# Altium PCB MLC - 8266.PcbDoc
Units mil, origin at the board's own origin, x right, y up, seen from the top; angles counter-clockwise.
Board outline 1791.34 x 663.39 mil, 2 copper layers (Top, Bottom), stack 10.63 mil thick; 37 components, 35 nets, 142 pads, 83 vias.
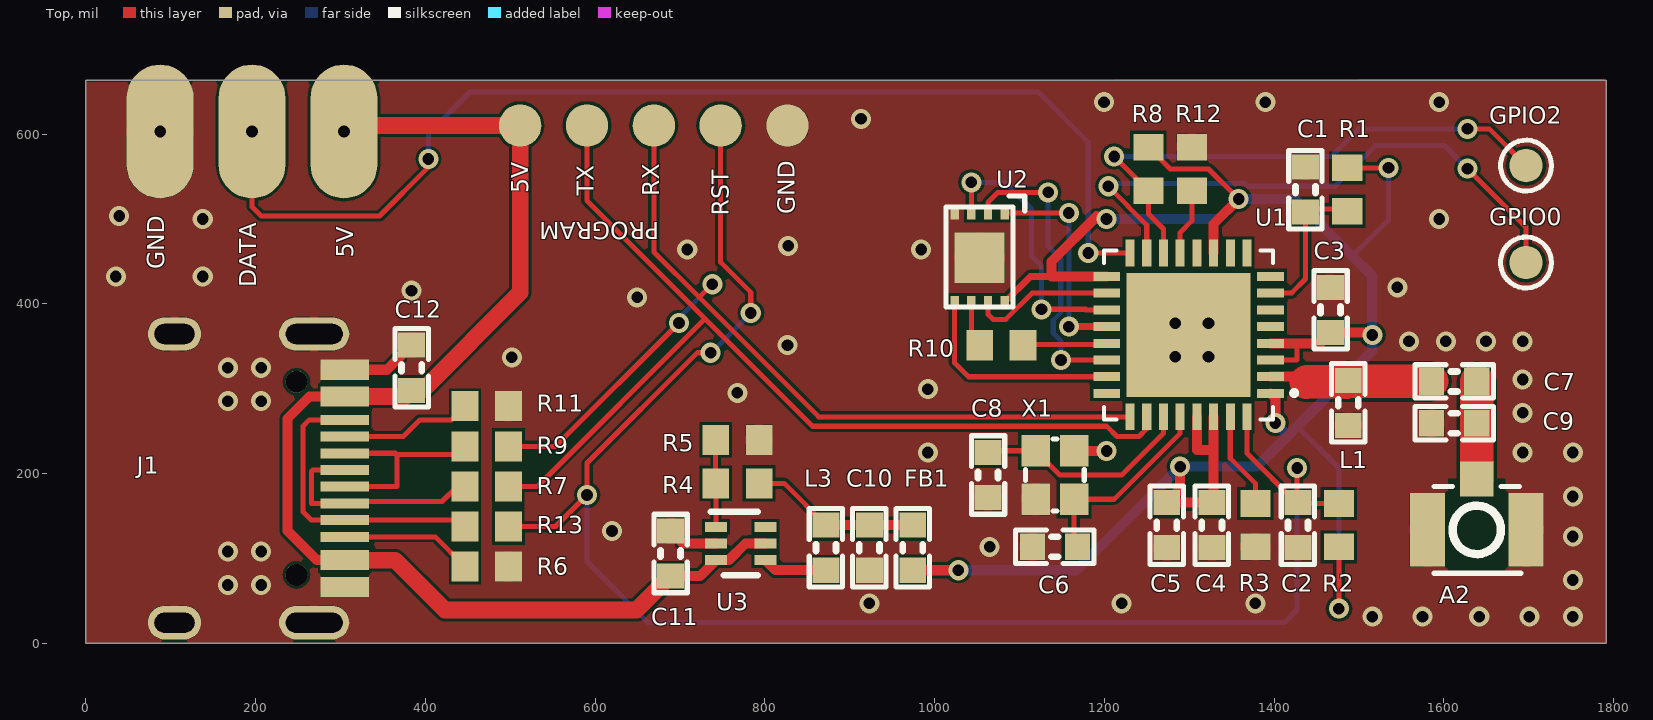
[diagram p0: Top view]
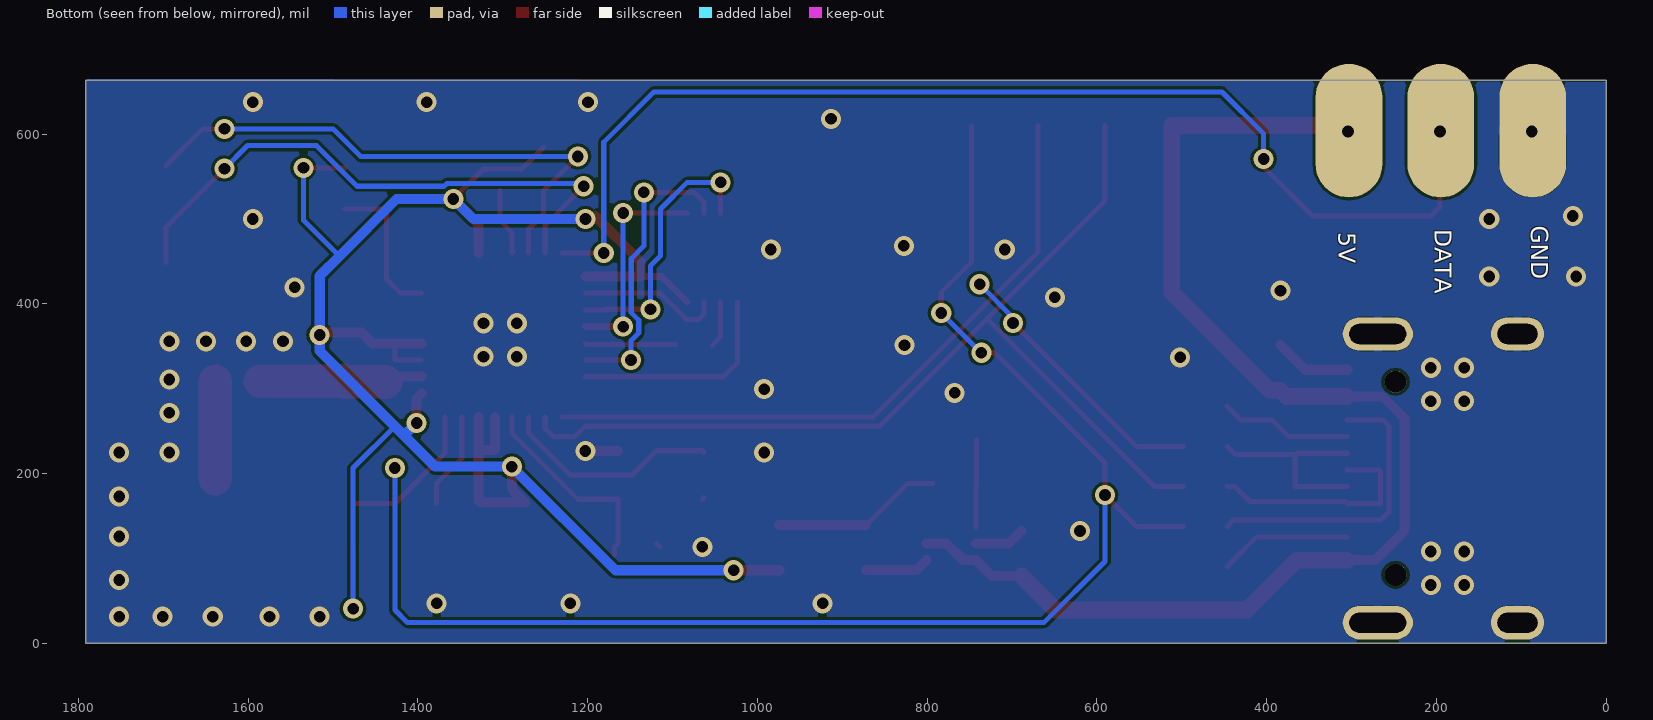
[diagram p1: Bottom view, seen from below]
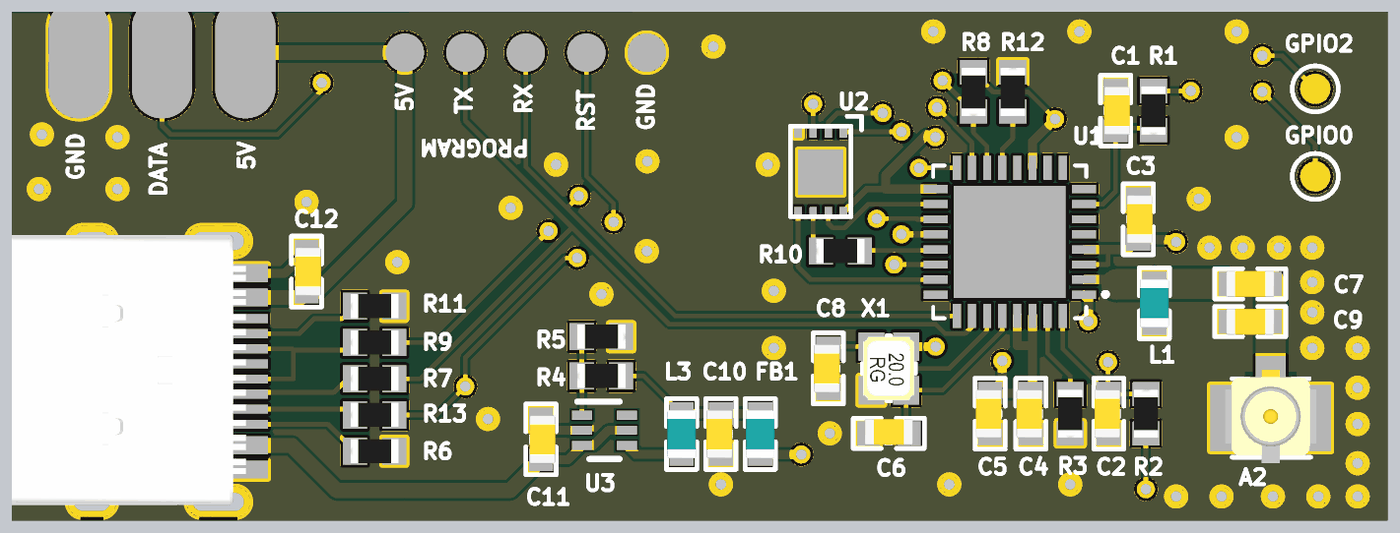
[diagram p2: 3D render of the assembled board from above, using the file's embedded part models]

## Layer stack, top to bottom
Top Solder: solder mask 0.4, Solder Resist, Dk 3.5
Top: signal copper 1.378
Prepreg: core 7.874, 7628, Dk 4.2
Bottom: signal copper 1.378
Bottom Solder: solder mask 0.4, Solder Resist, Dk 3.5

## Board outline
0,0 0,663.39 1791.34,663.39 1791.34,0

## Design rules (kind name [scope] priority, off if disabled: settings)
Clearance [All] p1: gap=3.5 ignorepadtopadclearanceinfootprint=TRUE
ComponentClearance [All] p1 off: gap=10 collisioncheckmode=3 verticalgap=10 showdistances=FALSE
DiffPairsRouting [All] p1: maxlimit=10 minlimit=3.5 mostfreqgap=7.87 toplayer_minwidth=3.5 toplayer_maxwidth=15 toplayer_prefwidth=5.91 bottomlayer_minwidth=3.5 bottomlayer_maxwidth=15 bottomlayer_prefwidth=5.91 maxuncoupledlength=500
MatchedLengths usb [All] p1: tolerance=39.37 checknetsindiffpair=FALSE checkdiffpairvsdiffpair=TRUE checkxsignals=TRUE checkothers=TRUE
PolygonConnect 2pinconn [InNet('GND')] p1 off: connectstyle=Direct reliefconductorwidth=10 reliefentries=4 polygonreliefangle="90 Angle" airgapwidth=10
PolygonConnect vbus [InNet('VBUS')] p2 off: connectstyle=Direct reliefconductorwidth=10 reliefentries=4 polygonreliefangle="90 Angle" airgapwidth=10
PolygonConnect nothermals [InNet('VOUT')] p3 off: connectstyle=Direct reliefconductorwidth=0 reliefentries=4 polygonreliefangle="90 Angle" airgapwidth=0
PolygonConnect PolygonConnect_1 [All] p4 off: connectstyle=Relief reliefconductorwidth=10 reliefentries=4 polygonreliefangle="90 Angle" airgapwidth=10
RoutingVias [All] p1: holewidth=13.78 width=23.62 viastyle="Through Hole" minholewidth=7.87 minwidth=17.72 maxholewidth=248.03 maxwidth=50
SolderMaskExpansion [All] p1: expansion=4
Width [All] p1: maxlimit=39.37 minlimit=5 preferedwidth=7.87
28 further rules are at their usual default settings.

## Components (designator, comment, footprint, x,y, rotation, side; value= is the part's Value field where it differs from the comment)
A2 "U.FL-R-SMT-1" "COAXIAL RF U.FL-R-SMT-1" 1638.78,133.86 r180 top
C1 "100nF" C0603 1437.01,534.72 r270 top value=100pF
C2 "100nF" C0603 1428.13,139.41 r90 top value=100pF
C3 "1uF" C0603 1466.54,392.99 r270 top value=100pF
C4 "100nF" C0603 1326.77,139.41 r90 top value=100pF
C5 "1uF" C0603 1273.62,139.41 r90 top value=100pF
C6 "10pF" C0603 1141.73,113.82 r0 top value=100pF
C7 "8.2pF" CAPC1608X06L 1612.2,308.7 r0 top value=100pF
C8 "10pF" C0603 1062.99,198.46 r90 top value=100pF
C9 "2.4pF" CAPC1608X06L 1612.2,259.49 r0 top value=100pF
C10 "22uF" C0603 923.23,112.83 r90 top value=100pF
C11 "4.7uF" C0603 688.98,105.94 r270 top value=100pF
C12 "1uF" C0603 383.86,324.8 r270 top value=100pF
FB1 "Ferrite" IND0603 974.41,112.83 r90 top value=120R/0.55A
GPIO0 "TP" TP_SMD_Ø1.0mm 1696.85,448.82 r90 top
GPIO2 "TP" TP_SMD_Ø1.0mm 1696.85,562.99 r90 top
J1 "USB-C" TYPE-C-31-M-12 305.12,322.48 r270 top locked
L1 "1.5nH" IND0603 1487.42,283.46 r90 top value=120R/0.55A
L3 "1uH" IND0603 872.05,112.83 r90 top value=120R/0.55A
PROGRAM "Programmer" ProgramPins 669.29,610.24 r180 top
R1 "10K" RES0603R 1486.22,534.72 r90 top value=0R
R2 "10K" RES0603R 1476.38,139.41 r270 top value=0R
R3 "12K" RES0603R 1377.95,139.41 r90 top value=0R
R4 "453K" RES0603R 767.72,188.62 r0 top value=0R
R5 "100K" RES0603R 767.72,239.8 r180 top value=0R
R6 "1K" RES0603R 472.44,90.55 r0 top value=0R
R7 "0R" RES0603R 472.44,185.04 r0 top
R8 "10K" RES0603R 1251.97,559.06 r90 top value=0R
R9 "0R" RES0603R 472.44,232.28 r0 top
R10 "50R" RES0603R 1078.74,351.38 r0 top value=0R
R11 "1K" RES0603R 472.44,279.53 r0 top value=0R
R12 "10K" RES0603R 1303.15,559.06 r270 top value=0R
R13 "0R" RES0603R 472.44,137.8 r0 top
U1 "ESP8266EX" *QFN50P500X500X80-33N 1299.21,363.46 r180 top locked
U2 "FM25Q08A-DN-T-G" FM25Q08A 1023.62,506.54 r0 top
U3 "TLV62568ADRLR" DRL0006A 771.65,117.76 r0 top value=N/A
X1 "26MHZ" BT-XTAL_2016 1141.73,198.46 r270 top value=32MHz

## Footprints (in the part's own frame and the unit in brackets; to place one, negate y for a bottom-side part, rotate by r counter-clockwise, add the part's x,y. Pads: shape width x height; smd on the part's side, far side on the other; paste and mask are expansions set on the pad)
*QFN50P500X500X80-33N [mm]
  rect 0.8x0.27 smd: 1(-2.45,1.75) 2(-2.45,1.25) 3(-2.45,0.75) 4(-2.45,0.25) 5(-2.45,-0.25) 6(-2.45,-0.75) 7(-2.45,-1.25) 8(-2.45,-1.75) 17(2.45,-1.75) 18(2.45,-1.25) 19(2.45,-0.75) 20(2.45,-0.25) 21(2.45,0.25) 22(2.45,0.75) 23(2.45,1.25) 24(2.45,1.75)
  rect 0.27x0.8 smd: 9(-1.75,-2.45) 10(-1.25,-2.45) 11(-0.75,-2.45) 12(-0.25,-2.45) 13(0.25,-2.45) 14(0.75,-2.45) 15(1.25,-2.45) 16(1.75,-2.45) 25(1.75,2.45) 26(1.25,2.45) 27(0.75,2.45) 28(0.25,2.45) 29(-0.25,2.45) 30(-0.75,2.45) 31(-1.25,2.45) 32(-1.75,2.45)
  rect 3.7x3.7 smd: 33(0,0)
  silkscreen extent -3.24,-2.53 2.53,2.53, body extent -2.53,-2.53 2.53,2.53, height 0.85
BT-XTAL_2016 [mm]
  rect 0.95x0.85 smd: 1(-0.725,-0.575) 2(0.725,-0.575) 3(0.725,0.575) 4(-0.725,0.575)
  silkscreen extent -1.08,-0.88 1.08,0.88, body extent -1.05,-0.85 1.05,0.85, height 0.56
C0603 [mm]
  rect 0.75x0.8 smd: 1(-0.675,0) 2(0.675,0)
  silkscreen extent -1.17,-0.5 1.17,0.5, body extent -0.8,-0.38 0.8,0.48, height 0.8
CAPC1608X06L [mm]
  rect 0.75x0.8 smd: 1(-0.675,0) 2(0.675,0)
  silkscreen extent -1.17,-0.5 1.17,0.5, body extent -0.8,-0.43 0.8,0.43, height 0.8
"COAXIAL RF U.FL-R-SMT-1" [mm]
  rect 1x1.05 smd: 1(0,-1.525)
  rect 1.05x2.2 smd: 2(-1.475,0) 2(1.475,0)
  Top pour cut-out: 0.85,1.3 -0.85,1.3 -0.85,-1.525 0.85,-1.525
  silkscreen extent -1.32,-1.3 1.28,1.3, body extent -1.5,-1.6 1.5,1.5, height 1.25
DRL0006A [mm]
  rect 0.67x0.3 smd paste+0 mask+0.051: 1(-0.74,0.5) 2(-0.74,0) 3(-0.74,-0.5) 4(0.74,-0.5) 5(0.74,0) 6(0.74,0.5)
  silkscreen extent -0.9,-0.95 0.5,0.95, body extent -0.76,-0.76 0.76,0.89, height 0.25
FM25Q08A [mm] "Flashboi"
  rect 0.25x0.35 smd: 1(1.5,0) 2(1,0) 3(0.5,0) 4(0,0) 5(0,-2.65) 6(0.5,-2.65) 7(1,-2.65) 8(1.5,-2.65)
  rect 1.5x1.5 smd: 4(0.75,-1.325)
  silkscreen extent -0.25,-2.8 2.1,0.53, body extent -0.13,-2.79 1.65,0.13, height 0.75
IND0603 [mm]
  rect 0.75x0.8 smd: 1(-0.675,0) 2(0.675,0)
  silkscreen extent -1.17,-0.5 1.17,0.5, body extent -0.8,-0.48 0.8,0.48, height 0.8
ProgramPins [mm]
  round 1.27 smd: 1(4,0) 2(2,0) 3(0,0) 4(-2,0) 5(-4,0)
RES0603R [mm] "resistor 0603 reflow soldering"
  rect 0.8x0.9 smd: 1(-0.65,0) 2(0.65,0)
  body extent -0.8,-0.4 0.8,0.4, height 0.45
TP_SMD_Ø1.0mm [mm]
  round 1 smd paste-5: 1(0,0)
  silkscreen extent -0.76,-0.76 0.76,0.76
TYPE-C-31-M-12 [mm]
  rect 0.6x1.45 smd: 1(0,0) 1(6.5,0) 2(0.8,0) 2(5.7,0)
  rect 0.3x1.45 smd: 3(1.5,0) 4(2,0) 5(2.5,0) 6(3,0) 7(3.5,0) 8(4,0) 9(4.5,0) 10(5,0)
  oval 1x2.1 hole 1.7 slot 0.6 at 0 deg: 11(-1.07,-0.915) 11(7.57,-0.915)
  oval 1x1.6 hole 1.2 slot 0.6 at 0 deg: 11(-1.07,-5.095) 11(7.57,-5.095)
  round 0.65 hole 0.65: 12(0.36,-1.445) 12(6.14,-1.445)
  body extent -1.27,-7.75 7.68,0, height 3.27

## Part data
A2: "ONN U.FL RCPT STR 50 OHM SMD", Manufacturer="Hirose Electric Co Ltd", Part number IPS=N.A., Supplier Part Number 1=H11891DKR-ND, Artikkelnr Noca=N.A., ComponentLink1Description=Datasheet, ComponentLink1URL=https://media.digikey.com/pdf/Data%20Sheets/Hirose%20PDFs/UFL%20Series.pdf, ComponentLink2Description="Supplier link", Footprint Doc="COAXIAL RF U.FL-R-SMT-1", LatestRevisionDate=2018-05-07, Manufacturer Part Number=U.FL-R-SMT-1, Part Number=U.FL-R-SMT-1, Pin Count=3, Published=2018-05-07, Publisher="Nordic Semiconductor", Supplier 1=Digi-Key
C1 C2 C3 C4 C5 C6 C7 C8 C9 C10 C11 C12: library part CAP, "Capacitor", Published=8-Jun-2000, Publisher="Altium Limited", Revision="July-2002: Re-released for DXP Platform."
FB1: "Ferrite Bead, 120 Ohm @ 100MHz, 500mA, 250 mOhm Max", Manufacturer=Murata, Manufacturer Part Number=BLM15AG121SN1D, Part Number=FB0402-120R@100M-500mA, Part number IPS=N.A., Supplier Part Number 1=490-1005-1-ND, Artikkelnr Noca=33029317, ComponentLink1Description=Datasheet, ComponentLink2Description="Supplier link", Footprint Doc=0402, HelpURL=http://search.murata.co.jp/Ceramy/image/img/PDF/ENG/L0110S0100BLM15A_SN.pdf, LatestRevisionDate=2014-01-10, Note="Chip EMIFIL Inductor Type Chip Ferrite Bead", Pin Count=2, Published=2011-11-14, Publisher="Nordic Semiconductor", Supplier 1=Digi-Key, Supplier 2=Farnell, Supplier Part Number 2=151-5760
L1 L3: "Inductor", Manufacturer=Murata, Manufacturer Part Number=BLM15AG121SN1D, Part Number=FB0402-120R@100M-500mA, Part number IPS=N.A., Supplier Part Number 1=490-1005-1-ND, Artikkelnr Noca=33029317, ComponentLink1Description=Datasheet, ComponentLink2Description="Supplier link", Footprint Doc=0402, HelpURL=http://search.murata.co.jp/Ceramy/image/img/PDF/ENG/L0110S0100BLM15A_SN.pdf, LatestRevisionDate=2014-01-10, Note="Chip EMIFIL Inductor Type Chip Ferrite Bead", Pin Count=2, Published=2011-11-14, Publisher="Nordic Semiconductor", Supplier 1=Digi-Key, Supplier 2=Farnell, Supplier Part Number 2=151-5760
PROGRAM: "Programmer header"
R1 R2 R3 R4 R5 R6 R7 R8 R9 R10 R11 R12 R13: "Resistor, ±5%, 0.05W", Part Number=R0201-0R, Part number IPS=00000003245, Artikkelnr Noca=N.A., ComponentLink1Description=Datasheet, ComponentLink2Description="Supplier link", Footprint Doc=0201, LatestRevisionDate=2017-11-09, Note="Chip Res 5%", Pin Count=2, Published=2014-11-13, Publisher="Nordic Semiconductor"
U1: Package="VFQFN-32 Espressif Systems", Availability=Unavailable, MF="Espressif Systems", MP=ESP8266EX, Price=None, SnapEDA_Link=https://www.snapeda.com/parts/ESP8266EX/Espressif%20Systems/view-part/555861/?ref=snap
U2: library part Flash, "FM25Q08A-DN-T-G, 8Mb flash, compadable with  FM25W02-SN-T-G, 2Mb flash"
U3: Manufacturer Name="Texas Instruments", Manufacturer Part Number=TLV62568ADRLR, PackageReference=TLV62568ADRLR
X1: "X201626MOD4SI", Manufacturer=Golledge, Manufacturer Part Number=MP06003, Part Number=XTAL_SMD2016_32MHz_8pF_Golledge, Part number IPS=N.A., Artikkelnr Noca=22010050, ComponentLink1Description=Datasheet, ComponentLink2Description="Supplier link", Footprint Doc=XTAL_2016, HelpURL=\\hizz\pro\app9717\Datasheet\crystals\Golledge\mp06003.pdf, LatestRevisionDate=2016-11-02, Note="XTAL SMD 32.000MHz", Pin Count=4, Published=2016-11-02, Publisher="Nordic Semiconductor", Supplier 1="Link Nordic"

## Free pads (board coordinates)
  oval 78.74x157.48 smd far side: 5(86.61,604.21) 5(194.88,604.21) 5(303.15,604.21)
  oval 78.74x157.48 smd: 5(87.6,603.23) 5(195.87,603.23) 5(304.13,603.23)

## Via types
v1: diameter 23.62, hole 13.78, Top to Bottom, 83 vias

## Nets (pads, with @x,y where several pads share a name; then routed paths per layer and width w, separated by ;. In a path a pad name is that pad's centre, name@x,y a point inside that pad or via, vN(x,y) a via of type N, cw(c..) or ccw(c..) an arc to the next point about the centre after c; other vN are vias at no path point)
3.3V: C10.2 FB1.2 L3.2 R4.2 | length 201.5
  Top w6: R4.2 822.83,188.62 L3.2
  Top w12: L3.2 C10.2 FB1.2
3V3: C3.2 C4.2 C5.2 FB1.1 R1.2 R2.2 R8.2 U1.1 U1.3 U1.4 U1.11 U1.17 U1.29 U1.30 U2.8 | length 2521.2
  Top w6: R8.2 1277.56,559.06 1322.83,559.06 v1(1358.27,523.62) ; U1.3 1427.17,333.94 1427.17,351.65 1429.13,353.62 ; v1(1476.38,40.98) R2.2 ; R1.2 v1(1534.72,560.31)
  Top w8: U2.8 1112.83,432.36 1137.8,432.36
  Top w11.81: v1(1289.37,208.31) 1289.37,181.73 C5.2 C4.2 1328.74,167.95 1328.74,227.99 ; U1.29 1309.06,227.99 1328.74,227.99 ; U1.30 1328.74,227.99 ; U1.11 1328.74,494.09 v1(1358.27,523.62) ; U1.1 1401.57,288.66 v1(1401.57,259.84) ; U1.4 1429.13,353.62 1453.74,353.62 C3.2 1512.8,366.42 v1(1515.75,363.46)
  Top w12: FB1.1 v1(1027.95,86.26) ; v1(1202.55,500) 1194.17,500 1190.94,503.23 1137.8,450.08 1137.8,432.36 U1.17
  Bottom w6: 1427.17,255.91 1476.38,206.69 v1(1476.38,40.98) ; 1492.48,456.34 1534.72,498.58 v1(1534.72,560.31)
  Bottom w12: v1(1027.95,86.26) 1167.32,86.26 v1(1289.37,208.31) 1379.57,208.31 1417.32,246.06 ; v1(1202.55,500) 1334.65,500 v1(1358.27,523.62) 1425.2,523.62 1492.48,456.34 1515.75,433.07 v1(1515.75,363.46) 1515.75,344.49 1427.17,255.91 1417.32,246.06 ; v1(1401.57,259.84) 1415.35,246.06 1417.32,246.06
5V: C11.2 C12.2 J1.2 pad.5@303.15,604.21 pad.5@304.13,603.23 PROGRAM.1 U3.3 U3.5 | length 1509.6
  Top w11.81: J1.2@305.12,98.07 272.27,98.07 237.63,132.71 237.63,264.99 263.62,290.98 J1.2@305.12,290.98 ; C11.2 723.82,79.37 U3.3 757.52,98.07 777.2,117.76 U3.5
  Top w19.68: v1(304.13,603.23) 311.14,610.24 PROGRAM.1 511.81,413.39 396.65,298.23 C12.2 376.61,290.98 J1.2@305.12,290.98 ; J1.2@305.12,98.07 364.53,98.07 423.23,39.37 648.98,39.37 C11.2
EN: C1.2 R1.1 U1.7 | length 185.4
  Top w6: U1.7 1420.87,412.68 1420.87,413.27 1437.01,429.41 C1.2 1433.35,511.81 R1.1@1486.22,511.81
GND: A2.2 C1.1 C2.1 C3.1 C4.1 C5.1 C6.1 C8.1 C9.1 C10.1 C11.1 C12.1 J1.1 J1.11 L1.1 pad.5@86.61,604.21 pad.5@87.6,603.23 PROGRAM.5 R3.1 R5.1 R6.2 R11.2 R12.1 U1.33 U2.4 U3.2 X1.2 X1.4 | length 197.2
  Top w6: C8.1 C8.1@1064.96,169.92 ; C6.1 C6.1@1119.09,117.76
  Top w11.81: J1.1@305.12,322.48 354.96,322.48 C12.1 ; C11.1 703.74,117.76 U3.2 ; X1.4 1202.55,227.01 v1(1202.76,226.8)
  other v1: 1515.75,31.5 1574.8,31.5 1641.73,31.5 1700.79,31.5 1751.97,31.5 923.23,47.24 1220.47,47.24 1377.95,47.24 167.32,68.9 206.69,68.9 1751.97,74.8 167.32,108.27 206.69,108.27 1064.96,113.82 1751.97,125.98 620.08,132.52 1751.97,173.23 992.13,225.04 1692.91,225.04 1751.97,225.04 1692.91,271.65 167.32,285.43 206.69,285.43 767.72,295.28 992.13,299.65 1692.91,311.02 167.32,324.8 206.69,324.8 501.97,337.07 1283.46,337.87 1322.83,337.87 826.77,351.38 1559.06,355.94 1602.36,355.94 1649.61,355.94 1692.91,355.94 1283.46,377.24 1322.83,377.24 649.61,407.8 383.86,415.63 1545.28,419.57 35.43,432.36 137.8,432.36 708.66,464.21 984.25,464.21 827.52,468.5 137.8,500 1594.49,500 39.37,503.58 87.6,603.23 913.39,618.11 1199.61,637.8 1389.76,637.8 1594.49,637.8
GPIO12: U1.10
GPIO13: U1.12
GPIO14: U1.9
GPIO15: R12.2 U1.13 | length 82
  Top w6: U1.13@1287.4,461.89 U1.13 1289.37,484.21 1303.15,497.99 R12.2
GPIO16: U1.8
LED: pad.5@194.88,604.21 pad.5@195.87,603.23 U1.16 | length 1366.4
  Top w6: v1(195.87,603.23) 195.87,514.41 206.69,503.58 346.1,503.58 403.54,561.02 v1(403.54,570.87) ; v1(1181.1,459.92) U1.16
  Bottom w6: v1(403.54,570.87) 403.54,600.39 452.76,649.61 1122.05,649.61 1181.1,590.55 v1(1181.1,459.92)
NetA2_1: A2.1 C7.2 C9.2 | length 114.8
  Top w39.37: A2.1 C9.2 C7.2
NetC6_2: C6.2 U1.28 X1.3 | length 244.1
  Top w6: C6.2@1168.31,103.98 C6.2 1164.37,117.76 X1.3 1211.61,169.92 1289.37,247.68 U1.28
NetC7_1: C7.1 L1.2 U1.2 | length 243.1
  Top w8: 1425.2,314.25 1483.2,314.25 L1.2
  Top w11.81: U1.2 1425.2,314.25
  Top w39.37: 1438.01,307.75 1438.57,308.31 1484.57,308.31 1485.13,307.75 L1.2 1488.76,308.7 C7.1
NetC8_2: C8.2 U1.27 X1.1 | length 259
  Top w6: C8.2 1064.96,227.01 X1.1 1147.64,198.46 1220.47,198.46 1269.68,247.68 U1.27
NetGPIO0_1: GPIO0.1 U1.15 | length 693.6
  Top w6: v1(1204.72,538.66) 1227.75,515.63 1227.75,515.02 1250,492.78 U1.15 ; v1(1627.95,559.33) 1696.85,490.43 GPIO0.1
  Bottom w6: v1(1204.72,538.66) 1208,541.93 1365.85,541.93 1369.12,538.66 1471.73,538.66 1519.68,586.61 1600.67,586.61 v1(1627.95,559.33)
NetGPIO2_1: GPIO2.1 R8.1 U1.14 | length 654.6
  Top w6: v1(1211.61,573.82) R8.1 1251.97,505.91 1269.68,488.19 U1.14 ; v1(1627.95,606.3) 1653.54,606.3 GPIO2.1
  Bottom w6: v1(1211.61,573.82) 1467.52,573.82 1500,606.3 v1(1627.95,606.3)
NetJ1_3: J1.3 J1.9 R13.1 | length 351.2
  Top w6: J1.3 263.43,263.43 255.91,255.91 255.91,155.16 265.75,145.31 J1.9 439.33,145.31 R13.1
NetJ1_4: J1.4 R11.1 | length 156.6
  Top w6: J1.4 374.02,243.74 393.7,263.43 430.75,263.43 R11.1
NetJ1_5: J1.5 J1.7 R9.1 | length 245.8
  Top w6: J1.7 366.73,184.69 366.73,222.44 ; J1.5 365.12,224.06 366.73,222.44 ; R9.1 437.01,222.44 366.73,222.44
NetJ1_6: J1.6 J1.8 R7.1 | length 267.2
  Top w6: J1.6 267.36,204.37 265.75,202.76 265.75,165 J1.8 307.44,167.32 419.83,167.32 437.55,185.04 R7.1
NetJ1_10: J1.10 R6.1 | length 156.3
  Top w6: J1.10 411.77,125.63 R6.1
NetL3_1: L3.1 U3.4 | length 76.2
  Top w11.81: U3.4 812.6,86.26 L3.1
NetR3_2: R3.2 U1.31 | length 114.2
  Top w6: U1.31 1348.43,218.15 1377.95,188.62 R3.2
NetR4_1: R4.1 R5.2 U3.1 | length 102.5
  Top w6: R5.2 R4.1 742.52,188.23 U3.1
NetR10_1: R10.1 U2.6 | length 54.9
  Top w6: U2.6 1043.31,361.22 R10.1
RST: C2.2 PROGRAM.4 R2.1 R13.2 U1.32 | length 1983.4
  Top w6: R13.2 553.43,137.8 v1(590.55,174.92) 590.55,212.6 720.47,342.52 v1(736.22,342.52) ; PROGRAM.4 748.03,449.09 783.46,413.66 v1(783.46,389.41) ; U1.32 1368.11,224.06 C2.2@1427.17,165 ; v1(1427.17,206.69) C2.2@1427.17,165 ; R2.1@1476.38,165.98 1475.39,165 C2.2@1427.17,165
  Bottom w6: v1(590.55,174.92) 590.55,96.57 662.68,24.45 1412.24,24.45 1427.17,39.37 v1(1427.17,206.69) ; v1(736.22,342.52) 736.58,342.52 v1(783.46,389.41)
RXD0: PROGRAM.3 R9.2 U1.25 | length 1135.2
  Top w6: R9.2 553.5,232.28 v1(698.82,377.6) ; PROGRAM.3 669.29,461.26 722.76,407.8 ; v1(738.19,423.23) 722.76,407.8 ; U1.25 863.54,267.01 722.76,407.8
  Bottom w6: v1(698.82,377.6) 698.82,383.86 v1(738.19,423.23)
SD_CLK: R10.2 U1.21 | length 107.1
  Top w6: R10.2@1096.46,351.65 1097.05,352.25 1141.31,352.25 1201.38,352.25 U1.21
SD_CMD: U1.20 U2.1 | length 254.2
  Top w6: U2.1 1083.31,507.17 v1(1158.19,507.17)
  Top w8: v1(1158.19,373.31) U1.20
  Bottom w6: v1(1158.19,373.31) v1(1158.19,507.17)
SD_D0: U1.22 U2.2 | length 353.9
  Top w6: U2.2 1062.99,519.69 1074.8,531.5 v1(1133.86,531.5) ; v1(1148.9,333.94) U1.22
  Bottom w6: v1(1133.86,531.5) 1133.86,468.15 1148.69,453.32 1148.69,389.7 1139.88,380.89 1139.88,365.72 1148.9,356.7 v1(1148.9,333.94)
SD_D1: U1.23 U2.5 | length 257.4
  Top w6: U2.5 1023.62,330.71 1040.08,314.25 U1.23
SD_D2: U1.18 U2.7 | length 169.4
  Top w6: U2.7 1062.99,387.8 1068.9,381.89 1084.02,381.89 1114.8,412.68 U1.18
SD_D3: U1.19 U2.3 | length 322.2
  Top w6: U2.3 v1(1043.31,543.31) ; v1(1125.98,393.7) 1178.58,393.7 1177.87,392.99 U1.19
  Bottom w6: v1(1043.31,543.31) 1082.68,543.31 1114.17,511.81 1114.17,456.69 1125.98,444.88 v1(1125.98,393.7)
TXD0: PROGRAM.2 R7.2 U1.26 | length 1195.2
  Top w6: R7.2 532.16,185.04 728.35,381.23 728.35,383.86 ; PROGRAM.2 590.55,521.65 728.35,383.86 ; U1.26 1250,252.95 1240.79,243.74 1214.92,243.74 1202.76,255.91 856.3,255.91 728.35,383.86
pads on no net: J1.12 U1.5 U1.6 U1.24 U3.6

## Polygon pours and split planes (outlines as drawn)
GND on Bottom "Bottom-GND 1" (solid, pour order 8): 0,661.42 0,0 1791.34,0 1791.34,665.35
GND on Top "Top-GND" (solid, pour order 10): 0,661.42 0,0 1791.34,0 1791.34,665.35

## Silkscreen, mask and mechanical layers (free items; w line width, h text height)
Top Overlay:
  text "5V" at 521.43,530.45 h20 r90
  text "TX" at 598.43,527.62 h20 r90
  text "RX" at 675.92,527.03 h20 r90
  text "GND" at 835.29,505.91 h20 r90
  text "RST" at 757.39,503.94 h20 r90
  text "5V" at 315.33,454.37 h20 r90
  text "GND" at 92.72,440.94 h20 r90
  text "DATA" at 200.79,419.57 h20 r90
Bottom Overlay:
  text "GND" at 88.58,492.13 h20 r90
  text "DATA" at 202.01,488.19 h20 r90
  text "5V" at 314.96,484.25 h20 r90